# Altium PCB SUSTAINIAC_BO.PcbDoc
Units mm, origin at the board's own origin, x right, y up, seen from the top; angles counter-clockwise.
Board outline 31.5 x 23.62 mm, 2 copper layers (Top Layer, Bottom Layer); 15 components, 13 nets, 42 pads, 3 vias.
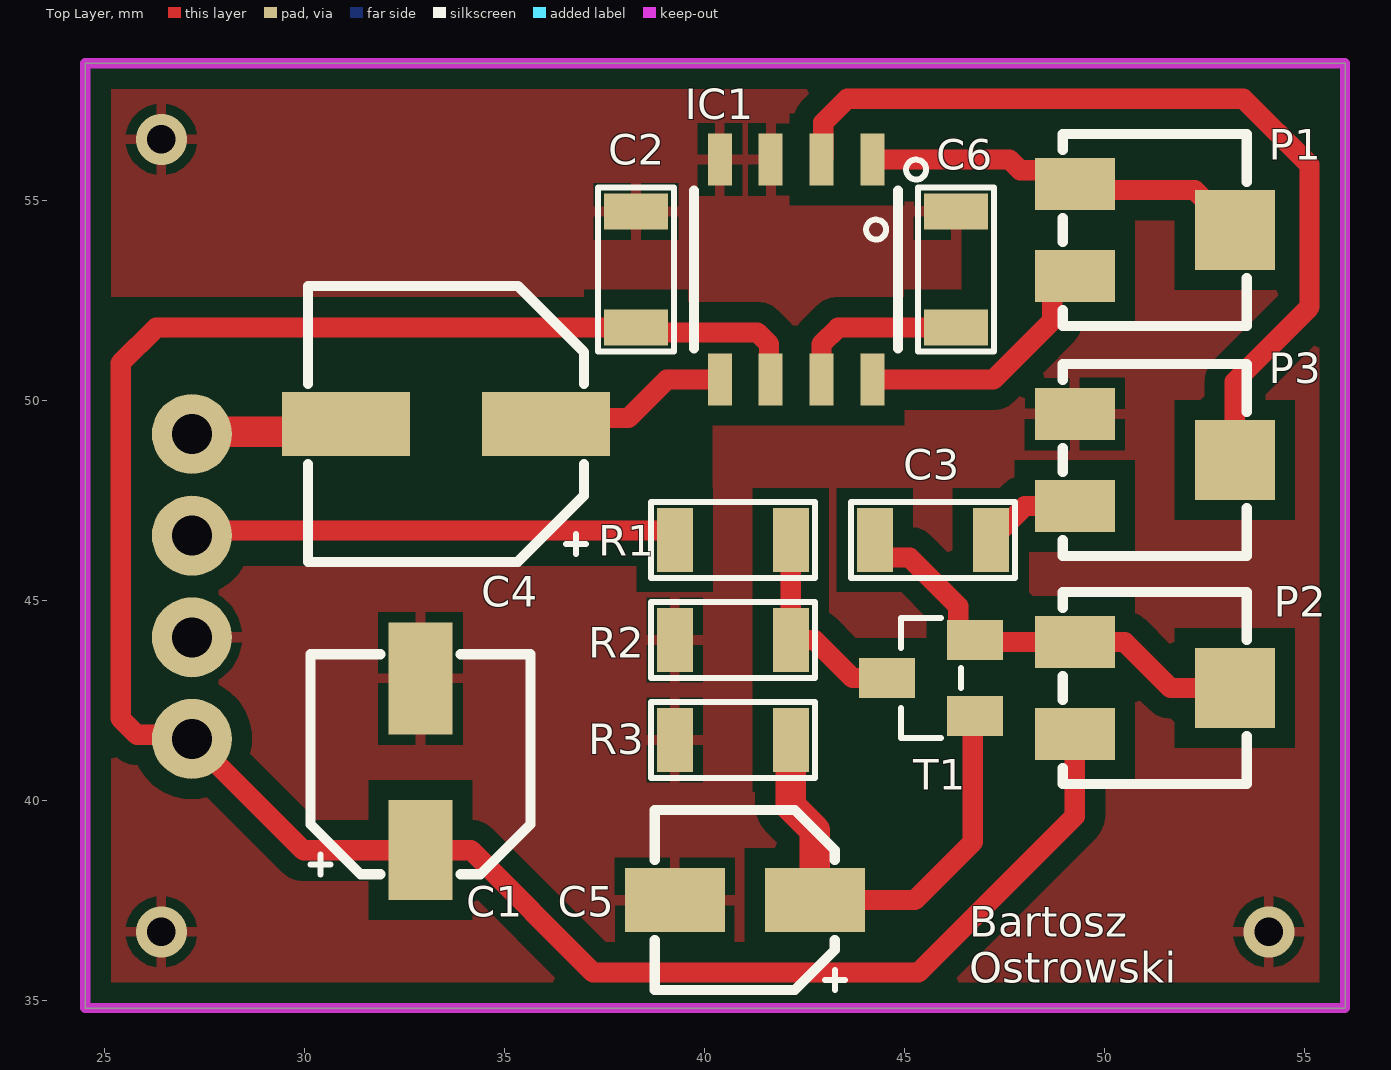
[diagram p0: Top Layer view]
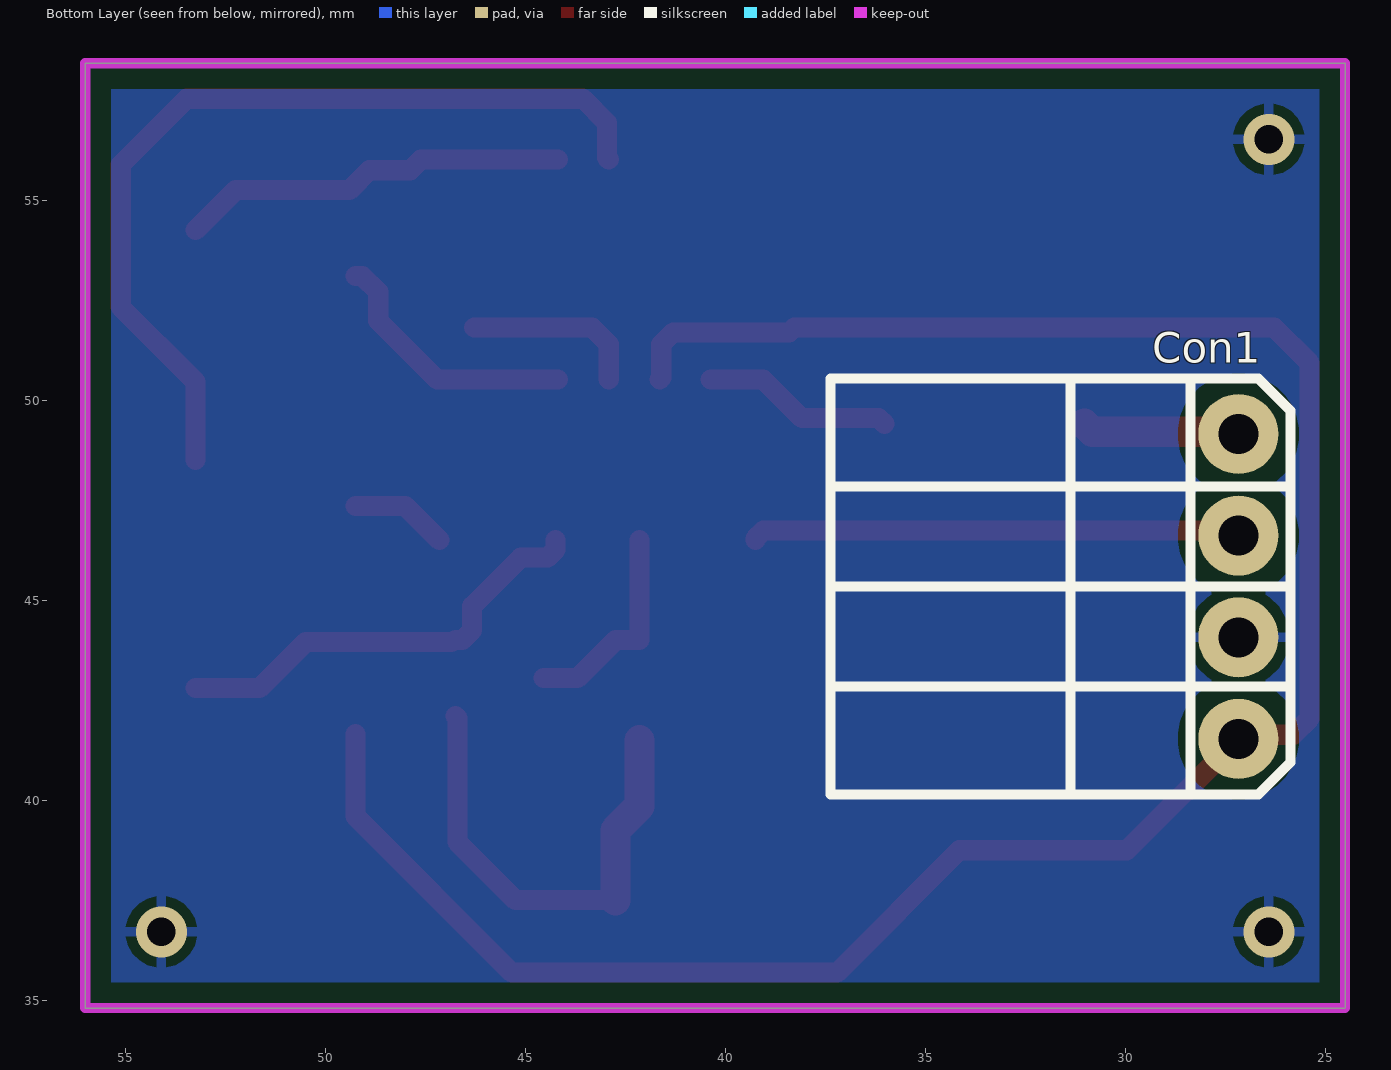
[diagram p1: Bottom Layer view, seen from below]

## Layer stack, top to bottom
Top Solder: solder mask 0.0102, Solder Resist, Dk 3.5
Top Layer: signal copper 0.0356
Dielectric 1: dielectric 0.32, FR-4, Dk 4.8
Bottom Layer: signal copper 0.0356
Bottom Solder: solder mask 0.0102, Solder Resist, Dk 3.5

## Board outline
24.511,34.798 24.511,58.42 56.007,58.42 56.007,34.798

## Design rules (kind name [scope] priority, off if disabled: settings)
Clearance [All] p1: gap=0.254 ignorepadtopadclearanceinfootprint=FALSE except(0.508: Arc-Poly Track-Poly SMDPad-Poly THPad-Poly Via-Poly Fill-Poly Poly-Poly)
PolygonConnect [All] p1: connectstyle=Relief reliefconductorwidth=0.254 reliefentries=4 polygonreliefangle="90 Angle" airgapwidth=0.254
RoutingVias [All] p1: holewidth=0.711 width=1.27 viastyle="Through Hole" minholewidth=0.711 minwidth=1.27 maxholewidth=0.711 maxwidth=1.27
SolderMaskExpansion [All] p1: expansion=0.102 istentingtop=FALSE
Width [All] p1: maxlimit=1.524 minlimit=0.508 preferedwidth=0.762
30 further rules are at their usual default settings.

## Components (designator, comment, footprint, x,y, rotation, side; value= is the part's Value field where it differs from the comment)
C1 "Capacitor_Pol" PANASONIC_C_BO 32.893,40.894 r0 top value=100uF
C2 "Capacitor" SMD_1206_BO 38.282,53.262 r270 top value=100nF
C3 "Capacitor" SMD_1206_BO 45.7,46.5 r0 top value=22nF
C4 "Capacitor_Pol" PANASONIC_D8_BO 33.528,49.403 r90 top value=220uF
C5 "Capacitor_Pol" PANASONIC_B_BO 41,37.5 r90 top value=22uF
C6 "Capacitor" SMD_1206_BO 46.282,53.262 r270 top value=100nF
Con1 "IN_OUT" "Connector double" 30.878,45.339 r270 bottom
IC1 "LM386" SO8_BO 42.282,53.262 r180 top
P1 "Potentiometer" POT_1801-J_BO 51.25,54.25 r180 top
P2 "Potentiometer" POT_1801-J_BO 51.25,42.8 r180 top
P3 "Potentiometer" POT_1801-J_BO 51.25,48.5 r180 top
R1 "Resistor" SMD_1206_BO 40.7,46.5 r0 top
R2 "Resistor" SMD_1206_BO 40.7,44 r0 top
R3 "Resistor" SMD_1206_BO 40.7,41.5 r0 top
T1 "J201" SOT23_BO 45.65,43.05 r90 top

## Footprints (in the part's own frame and the unit in brackets; to place one, negate y for a bottom-side part, rotate by r counter-clockwise, add the part's x,y. Pads: shape width x height; smd on the part's side, far side on the other; paste and mask are expansions set on the pad)
"Connector double" [mm]
  round 2 hole 1: 1(3.81,3.7) 2(1.27,3.7) 3(-1.27,3.7) 4(-3.81,3.7)
  silkscreen extent -5.2,-6.5 5.2,5, body extent -5.08,-6.36 5.08,4, height 3.04
PANASONIC_B_BO [mm]
  rect 1.6x2.5 smd: 1(0,-1.75) 2(0,1.75)
  silkscreen extent -2.25,-2.5 2.25,2.25, body extent -2.25,-2.5 2.25,2.5, height 6
PANASONIC_C_BO [mm]
  rect 1.6x2.5 smd: 1(0,-2.147)
  rect 1.6x2.8 smd: 2(0,2.147)
  silkscreen extent -2.75,-2.75 2.75,2.75, body extent -2.75,-3 2.75,3, height 6
PANASONIC_D8_BO [mm]
  rect 1.6x3.2 smd: 1(0,-2.497) 2(0,2.497)
  silkscreen extent -3.45,-3.5 3.45,3.45, body extent -3.45,-3.4 3.45,3.45, height 8
POT_1801-J_BO [mm]
  rect 2x1.3 smd: 1(2,-1.15) 3(2,1.15)
  rect 2x2 smd: 2(-2,0)
  silkscreen extent -2.3,-2.4 2.3,2.4, body extent -2.5,-2.4 2.63,2.4, height 3.5
SMD_1206_BO [mm]
  rect 0.9x1.6 smd: 1(-1.45,0) 2(1.45,0)
  silkscreen extent -2.05,-0.95 2.05,0.95, body extent -1.6,-0.8 1.6,0.82, height 0.5
SO8_BO [mm]
  rect 0.6x1.3 smd: 1(-1.905,-2.75) 2(-0.635,-2.75) 3(0.635,-2.75) 4(1.905,-2.75) 5(1.905,2.75) 6(0.635,2.75) 7(-0.635,2.75) 8(-1.905,2.75)
  silkscreen extent -3.25,-2.75 2.55,1.98, body extent -2.45,-3 2.45,3, height 1.75
SOT23_BO [mm]
  rect 1x1.4 smd: 1(-0.95,-1.1) 2(0.95,-1.1) 3(0,1.1)
  silkscreen extent -1.5,-0.75 1.5,0.75, body extent -1.5,-1.25 1.5,1.25, height 1.05

## Part data
Con1: library part CONNECTOR_4_PIN
P1: Resistance=1k
P2 P3: Resistance=100k
R1: Resistance=68k
R2: Resistance=1M
R3: Resistance=1.5k
T1: library part JFET

## Via types
v1: diameter 1.27, hole 0.711, Top Layer to Bottom Layer, 3 vias

## Nets (pads, with @x,y where several pads share a name; then routed paths per layer and width w, separated by ;. In a path a pad name is that pad's centre, name@x,y a point inside that pad or via, vN(x,y) a via of type N, cw(c..) or ccw(c..) an arc to the next point about the centre after c; other vN are vias at no path point)
+9V: C1.1 C2.2 Con1.1 IC1.6 P2.3 | length 56.7
  Top Layer w0.508: IC1.6 41.607,50.552 41.607,51.391 41.31,51.689 38.405,51.689 C2.2 26.285,51.812 25.4,50.927 25.4,42.037 25.805,41.632 27.075,41.632 29.967,38.74 32.893,38.74 34.158,38.74 37.211,35.687 45.339,35.687 49.25,39.598 P2.3
GND: C1.2 C2.1 C5.2 C6.1 Con1.2 IC1.3 IC1.4 P3.1 R2.1 R3.1
  other v1: 26.416,36.703 54.102,36.703 26.416,56.515
IN: Con1.3 R1.1 | length 12.2
  Top Layer w0.508: Con1.3@27.178,46.736 39.054,46.736 39.25,46.54 R1.1
NetC3_1: C3.1 P2.1 P2.2 T1.2 | length 10.9
  Top Layer w0.508: C3.1 44.25,46.258 44.446,46.062 45.124,46.062 46.337,44.849 46.337,44.246 46.583,44 T1.2 ; T1.2@46.85,43.95 P2.1 50.5,43.95 51.65,42.8 P2.2
NetC3_2: C3.2 P3.3 | length 2.5
  Top Layer w0.508: C3.2 48,47.35 P3.3
NetC4_1: C4.1 IC1.5 | length 4.8
  Top Layer w0.508: C4.1 36.17,49.549 38.089,49.549 39.053,50.512 IC1.5
NetC5_1: C5.1 R3.2 T1.1 | length 12
  Top Layer w0.508: C5.1 45.25,37.5 46.7,38.95 46.7,42.05 T1.1
  Top Layer w0.762: R3.2 42.15,39.85 42.75,39.25 C5.1
NetC6_2: C6.2 IC1.7 | length 4.4
  Top Layer w0.508: IC1.7 42.917,51.397 43.332,51.812 C6.2
NetIC1_1: IC1.1 P1.1 P1.2 | length 9.8
  Top Layer w0.508: IC1.1 47.62,56.012 47.885,55.747 48.903,55.747 49.4,55.25 52.25,55.25 P1.2
NetIC1_2: IC1.2 P3.2 | length 22.2
  Top Layer w0.508: IC1.2 42.963,56.058 42.963,56.933 43.561,57.531 53.467,57.531 55.118,55.88 55.118,52.324 53.25,50.456 P3.2
NetIC1_8: IC1.8 P1.3 | length 6.6
  Top Layer w0.508: IC1.8 47.21,50.512 48.684,51.986 48.684,52.704 49.08,53.1 P1.3
NetR1_2: R1.2 R2.2 T1.3 | length 5.3
  Top Layer w0.508: R1.2 R2.2 42.75,44 43.7,43.05 T1.3
OUT: C4.2 Con1.4 | length 4
  Top Layer w0.762: Con1.4@27.178,49.022 27.36,49.204 30.832,49.204 C4.2

## Polygon pours and split planes (outlines as drawn)
GND on Bottom Layer "GND_BOTTOM" (solid, remove dead copper, pour order 0): 24.511,58.42 56.007,58.42 56.007,34.798 24.511,34.798
GND on Top Layer "GND_TOP" (solid, remove dead copper, pour order 1): 24.511,58.42 56.007,58.42 56.007,34.798 24.511,34.798

## Keep-outs
Keep-Out Layer:
  the board outline again, w0.254

## Other copper
Top Layer:
  pour cut-out: 27.432,52.578 25.019,52.578 25.019,47.244 39.644,47.244 40.208,47.808 40.198,47.818 40.198,49.356 36.974,52.581
  pour cut-out: 43.418,54.962 45.482,54.962 45.482,55.35 45.425,55.407 45.39,55.372 43.434,55.372
  pour cut-out: 46.409,54.008 46.409,52.778 47.117,52.07 48.006,52.07 48.006,55.118 47.879,55.245 47.625,54.991 46.482,54.991

## Silkscreen, mask and mechanical layers (free items; w line width, h text height)
Top Overlay:
  text "Bartosz  / Ostrowski" at 46.609,35.433 h0.76